# EAGLE board Placa_sensores_brd (EAGLE 9.7.0)
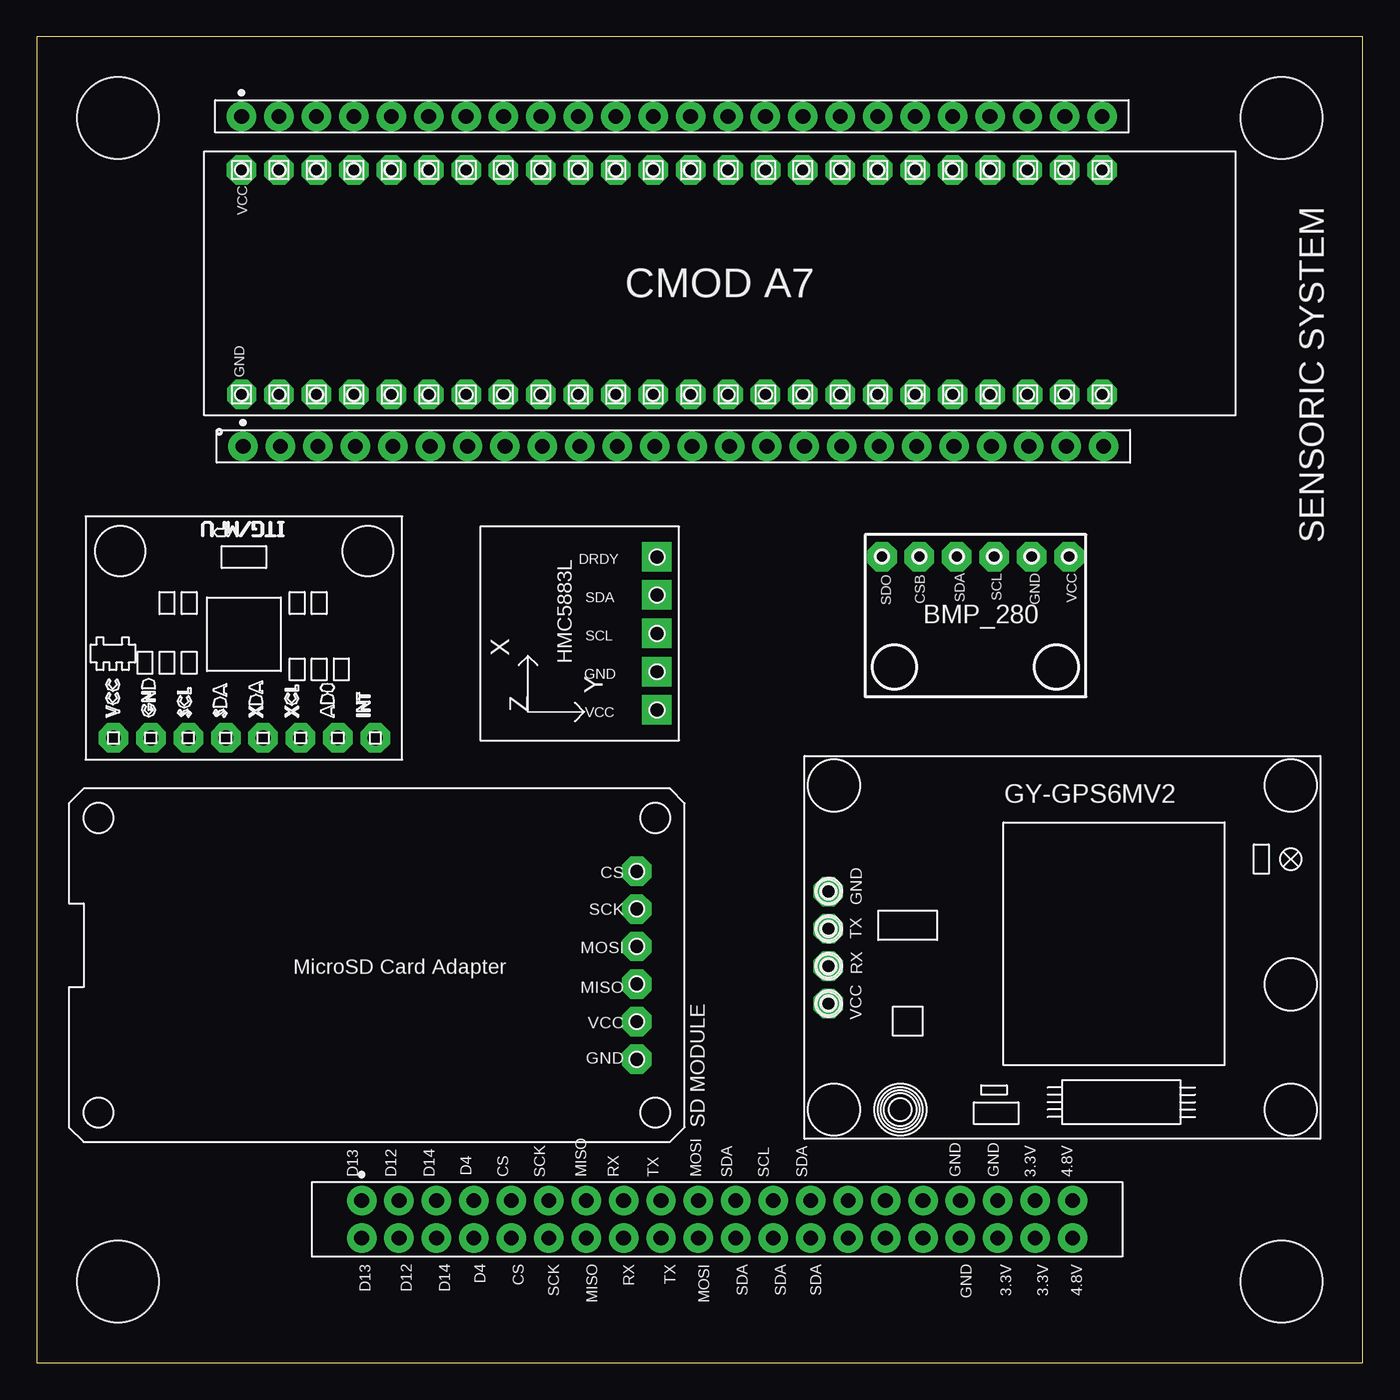
[diagram p0: board, top side]
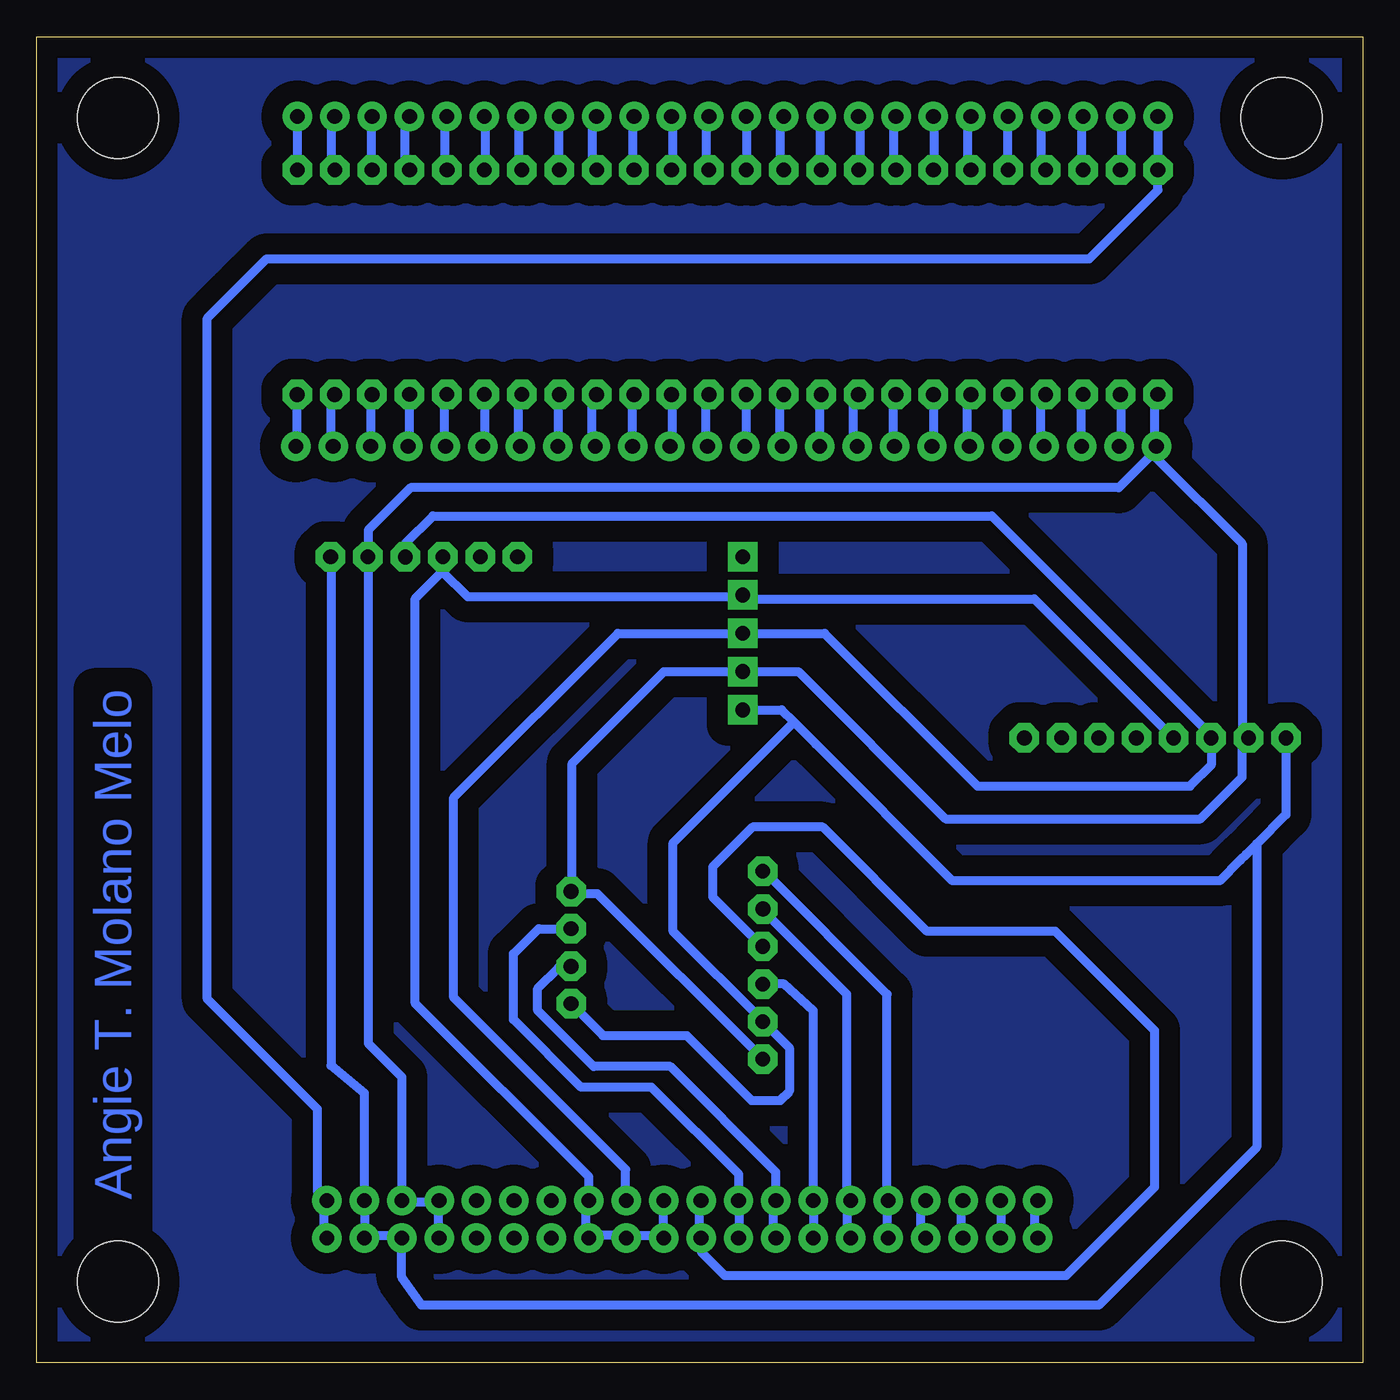
[diagram p1: board, bottom side, seen from below]

Size 90 x 90 mm. Coordinates in mm from the lower left corner, seen from the top.
Outline: 0,90 0,0 90,0 90,90 0,90
Copper layers (1*16): Top 0.035mm / dielectric 1.53mm / Bottom 0.035mm
Design rules "LCFI Uniandes DRC (Eagle-Fusion360 11-2022) *": minimum track width 10mil, minimum drill 0.6mm, track to track 0.3mm, track to pad 0.3mm, pad to pad 0.5mm, via to via 0.3mm, smd to smd 0.2mm, copper to edge 0.5mm, drill to drill 0.5mm, minimum pad ring 0.5mm, minimum via ring 0.3mm, stop-mask expansion 0.05mm, vias tented up to drill 0mil, thermal gap 0.3mm
Holes 5.5 mm at 5.5,84.5 84.5,84.5 5.5,5.5 84.5,5.5

## Footprints (pad centres in the part's own frame; a part is rotated, then mirrored left to right if it is on the bottom)
CMOD-A7 = drill 1 pad 1.8 octagon: 1 -31.795,-7.295; 2 -29.255,-7.305; 3 -26.724,-7.29; 4 -24.18,-7.302; 5 -21.64,-7.296; 6 -19.099,-7.301; 7 -16.557,-7.301; 8 -14.018,-7.301; 9 -11.479,-7.304; 10 -8.944,-7.301; 11 -6.401,-7.302; 12 -3.861,-7.301; 13 -1.322,-7.301; 14 1.222,-7.301; 15 3.76,-7.301; 16 6.299,-7.301; 17 8.835,-7.3; 18 11.381,-7.299; 19 13.921,-7.298; 20 16.459,-7.299; 21 18.999,-7.298; 22 21.542,-7.304; 23 24.077,-7.301; 24 26.624,-7.301; 25 26.619,7.944; 26 24.076,7.937; 27 21.541,7.947; 28 19.003,7.942; 29 16.457,7.935; 30 13.922,7.935; 31 11.379,7.94; 32 8.838,7.946; 33 6.292,7.937; 34 3.768,7.944; 35 1.221,7.935; 36 -1.318,7.94; 37 -3.862,7.94; 38 -6.405,7.94; 39 -8.94,7.945; 40 -11.481,7.951; 41 -14.025,7.936; 42 -16.554,7.944; 43 -19.099,7.942; 44 -21.641,7.94; 45 -24.177,7.942; 46 -26.718,7.938; 47 -29.257,7.942; 48 -31.801,7.94
GY-521 = drill 1 pad 1.82 octagon: ADO -8.64,11.65; GND 4.06,11.66; INT -11.17,11.66; SCL 1.51,11.66; SDA -1.03,11.66; VCC 6.6,11.66; XCL -6.1,11.66; XDA -3.56,11.66
GY-271 = drill 1 square: DRDY 5.11,-5.745; GND -2.69,-5.745; SCL -0.09,-5.745; SDA 2.51,-5.745; VCC -5.29,-5.745
GY-BMP280-FOOTPRINT = drill 1 pad 1.83 octagon: CSB -4.1,-3.8; GND -4.1,3.82; SCK -4.09,1.29; SDI -4.11,-1.26; SDO -4.11,-6.33; VCC -4.1,6.36
GPS-NEO-6M = drill 1 pad 1.778 octagon: P$1 -3.81,14.61; P$2 -1.28,14.61; P$3 1.27,14.61; P$4 3.8,14.61
PINHEADER = drill 1 pad 1.676: 1 0,0; 2 2.54,0; 3 5.08,0; 4 7.62,0; 5 10.16,0; 6 12.7,0; 7 15.24,0; 8 17.78,0; 9 20.32,0; 10 22.86,0; 11 25.4,0; 12 27.94,0; 13 30.48,0; 14 33.02,0; 15 35.56,0; 16 38.1,0; 17 40.64,0; 18 43.18,0; 19 45.72,0; 20 48.26,0; 21 48.26,-2.54; 22 45.72,-2.54; 23 43.18,-2.54; 24 40.64,-2.54; 25 38.1,-2.54; 26 35.56,-2.54; 27 33.02,-2.54; 28 30.48,-2.54; 29 27.94,-2.54; 30 25.4,-2.54; 31 22.86,-2.54; 32 20.32,-2.54; 33 17.78,-2.54; 34 15.24,-2.54; 35 12.7,-2.54; 36 10.16,-2.54; 37 7.62,-2.54; 38 5.08,-2.54; 39 2.54,-2.54; 40 0,-2.54
SD_MODULE = drill 1 pad 1.8 octagon: CS 6.38,-16.96; GND -6.37,-16.96; MISO -1.28,-16.96; MOSI 1.28,-16.96; SCK 3.82,-16.95; VCC -3.82,-16.96
PIN_1X24 = drill 1 pad 1.676: 1 0,0; 2 2.54,0; 3 5.08,0; 4 7.62,0; 5 10.16,0; 6 12.7,0; 7 15.24,0; 8 17.78,0; 9 20.32,0; 10 22.86,0; 11 25.4,0; 12 27.94,0; 13 30.48,0; 14 33.02,0; 15 35.56,0; 16 38.1,0; 17 40.64,0; 18 43.18,0; 19 45.72,0; 20 48.26,0; 21 50.8,0; 22 53.34,0; 23 55.88,0; 24 58.42,0

## Placement (x,y rotation side)
CMOD  CMOD-A7  [CMOD-A7]  45.7,73.02 0 top
U1  GY-521  [GY-521]  11.8,54.07 180 top
U2  HMC5883L  [GY-271]  36.34,49.6 90 top
U$1  GY-BPM280  [GY-BMP280-FOOTPRINT]  63.7,50.6 270 top
U$2  GPS-NEO-6M  [GPS-NEO-6M]  68.35,28.18 90 top
U$3  PINHEADER  [PINHEADER]  22.05,11 0 top
U$4  SD_MODULE  [SD_MODULE]  23.77,26.98 90 top
U$5  PIN1X24  [PIN_1X24]  13.9,84.6 0 top
U$6  PIN1X24  [PIN_1X24]  14,62.2 0 top

## Library data of the parts
CMOD = CMOD-A7
U1 = MPU6050
U2 = HMC5883L
U$1 = BMP_280
U$2 = GPS-NEO-6M
U$3 = PINHEADER-40
U$4 = SD_MODULE
U$5 U$6 = PIN_1X24

## Nets
3.3V: U1.VCC U2.VCC U$1.VCC U$2.P$1 U$3.19 U$3.22 U$3.23 U$4.VCC
4.8V: CMOD.48 U$3.20 U$3.21 U$5.1
CS: U$3.5 U$3.36 U$4.CS
D4: U$3.4 U$3.37
D12: U$3.2 U$3.39
D13: U$3.1 U$3.40
D14: U$3.3 U$3.38
GND: CMOD.1 U1.GND U2.GND U$1.GND U$2.P$4 U$3.17 U$3.18 U$3.24 U$4.GND U$6.1
MISO: U$3.7 U$3.34 U$4.MISO
MOSI: U$3.10 U$3.31 U$4.MOSI
N$3: CMOD.47 U$5.2
N$4: CMOD.46 U$5.3
N$5: CMOD.45 U$5.4
N$6: CMOD.44 U$5.5
N$7: CMOD.43 U$5.6
N$8: CMOD.42 U$5.7
N$9: CMOD.41 U$5.8
N$10: CMOD.27 U$5.22
N$11: CMOD.40 U$5.9
N$12: CMOD.39 U$5.10
N$13: CMOD.26 U$5.23
N$14: CMOD.38 U$5.11
N$15: CMOD.37 U$5.12
N$16: CMOD.36 U$5.13
N$17: CMOD.35 U$5.14
N$18: CMOD.34 U$5.15
N$19: CMOD.33 U$5.16
N$20: CMOD.32 U$5.17
N$21: CMOD.31 U$5.18
N$22: CMOD.30 U$5.19
N$23: CMOD.29 U$5.20
N$24: CMOD.28 U$5.21
N$25: CMOD.25 U$5.24
N$27: CMOD.2 U$6.2
N$28: CMOD.3 U$6.3
N$29: CMOD.4 U$6.4
N$30: CMOD.5 U$6.5
N$31: CMOD.6 U$6.6
N$32: CMOD.7 U$6.7
N$33: CMOD.24 U$6.24
N$34: CMOD.23 U$6.23
N$35: CMOD.22 U$6.22
N$36: CMOD.21 U$6.21
N$37: CMOD.20 U$6.20
N$38: CMOD.19 U$6.19
N$39: CMOD.18 U$6.18
N$40: CMOD.17 U$6.17
N$41: CMOD.16 U$6.16
N$42: CMOD.15 U$6.15
N$43: CMOD.14 U$6.14
N$44: CMOD.13 U$6.13
N$45: CMOD.12 U$6.12
N$46: CMOD.11 U$6.11
N$47: CMOD.10 U$6.10
N$48: CMOD.9 U$6.9
N$49: CMOD.8 U$6.8
RX: U$2.P$2 U$3.8 U$3.33
SCK: U$3.6 U$3.35 U$4.SCK
SCL: U1.SCL U2.SCL U$1.SCK U$3.12
SDA: U1.SDA U2.SDA U$1.SDI U$3.11 U$3.13 U$3.28 U$3.29 U$3.30
TX: U$2.P$3 U$3.9 U$3.32

## Tracks (layer width: path | path; a pad name or v marks a point on that pad's centre or on a via)
3.3V
  Bottom 0.61: 67.77,8.64 65.49,8.64 U$3.23 65.23,5.8 63.9,3.91 17.92,3.91 7.2,14.63 7.2,35.21 | 67.77,8.64 U$3.22 67.77,8.64 | U$1.VCC 70.04,54.45 70.04,20.17 67.77,18.3 U$3.19 67.77,10.91 67.77,8.64 | U$2.P$1 51.57,22.2 45.89,22.2 41.49,17.8 39.54,17.8 38.91,18.43 38.91,21.38 40.69,23.16 U$4.VCC 40.73,23.19 46.81,29.27 46.81,35.29 38.61,43.49 | 7.2,35.21 5.2,37.21 U1.VCC | 7.2,35.21 7.9,34.51 8.3,34.11 9.7,32.71 27.84,32.71 37.11,41.99 38.61,43.49 | U2.VCC 39.44,44.31 38.61,43.49
4.8V
  Bottom 0.61: U$3.21 70.49,8.64 70.49,10.91 U$3.20 70.95,11.64 70.95,17.21 78.43,24.69 78.43,70.9 74.4,74.94 18.56,74.94 13.9,79.6 CMOD.48 | U$5.1 CMOD.48 | CMOD.48
CS
  Bottom 0.61: U$4.CS 40.48,33.2 32.29,25.01 32.29,11.37 U$3.5 32.29,10.91 32.29,8.64 U$3.36
D4
  Bottom 0.61: U$3.37 30.02,8.64 30.02,10.91 U$3.4
D12
  Bottom 0.61: U$3.39 24.56,8.64 24.56,10.91 U$3.2
D13
  Bottom 0.61: U$3.40 22.29,8.64 22.29,10.91 U$3.1
D14
  Bottom 0.61: U$3.38 27.29,8.64 27.29,10.91 U$3.3
GND
  Bottom 0.61: 62.76,10.91 62.76,8.64 U$3.24 | 62.76,10.91 U$3.17 62.76,10.91 | 62.76,10.91 65.04,10.91 U$3.18 65.23,19.4 67.51,21.68 U$1.GND 67.51,56.51 64.63,59.39 16.56,59.39 14.1,61.85 U$6.1 | U$6.1 14,61.39 8.19,55.6 8.19,42.75 U1.GND 8.19,42.3 8.19,39.74 11.01,36.92 28.32,36.92 38.31,46.91 U2.GND 47.43,46.91 53.67,40.67 53.67,32.29 U$2.P$4 53.67,31.84 51.95,31.84 U$4.GND | CMOD.1 14.1,65.49 14.1,62.31 U$6.1
MISO
  Bottom 0.61: U$4.MISO 39.27,25.7 37.29,23.89 37.29,11.37 U$3.7 37.29,10.91 37.29,8.64 U$3.34
MOSI
  Bottom 0.61: U$3.10 45.02,10.91 45.02,8.64 U$3.31 44.91,7.53 43.31,5.92 20.12,5.92 14.11,11.93 14.11,22.53 20.87,29.29 29.57,29.29 36.64,36.36 41.41,36.36 44.13,33.64 44.13,31.62 40.76,28.26 U$4.MOSI
N$1
  pour Bottom (isolate 1.422): 0.2,0.2 89.8,0.2 89.8,89.8 0.2,89.8
N$3
  Bottom 0.61: CMOD.47 16.37,81.41 16.37,84.59 U$5.2
N$4
  Bottom 0.61: CMOD.46 19.1,81.41 19.1,84.59 U$5.3
N$5
  Bottom 0.61: CMOD.45 21.83,81.41 21.83,84.59 U$5.4
N$6
  Bottom 0.61: CMOD.44 24.1,81.41 24.1,84.59 U$5.5
N$7
  Bottom 0.61: CMOD.43 26.83,81.41 26.83,84.59 U$5.6
N$8
  Bottom 0.61: CMOD.42 29.11,81.41 29.11,84.59 U$5.7
N$9
  Bottom 0.61: CMOD.41 31.84,81.41 31.84,84.59 U$5.8
N$10
  Bottom 0.61: CMOD.27 67.31,81.41 67.31,84.59 U$5.22
N$11
  Bottom 0.61: CMOD.40 34.11,81.41 34.11,84.59 U$5.9
N$12
  Bottom 0.61: CMOD.39 36.84,81.41 36.84,84.59 U$5.10
N$13
  Bottom 0.61: CMOD.26 70.04,81.41 70.04,84.59 U$5.23
N$14
  Bottom 0.61: CMOD.38 39.57,81.41 39.57,84.59 U$5.11
N$15
  Bottom 0.61: CMOD.37 41.84,81.41 U$5.12
N$16
  Bottom 0.61: CMOD.36 44.57,81.41 44.57,84.59 U$5.13
N$17
  Bottom 0.61: CMOD.35 46.84,81.41 46.84,84.59 U$5.14
N$18
  Bottom 0.61: CMOD.34 49.57,81.41 49.57,84.59 U$5.15
N$19
  Bottom 0.61: CMOD.33 52.3,81.41 52.3,84.59 U$5.16
N$20
  Bottom 0.61: CMOD.32 54.58,81.41 54.58,84.59 U$5.17
N$21
  Bottom 0.61: CMOD.31 57.3,81.41 57.3,84.59 U$5.18
N$22
  Bottom 0.61: CMOD.30 59.58,81.41 59.58,84.59 U$5.19
N$23
  Bottom 0.61: CMOD.29 62.31,81.41 62.31,84.59 U$5.20
N$24
  Bottom 0.61: CMOD.28 65.04,81.41 65.04,84.59 U$5.21
N$25
  Bottom 0.61: CMOD.25 72.31,81.41 U$5.24
N$27
  Bottom 0.61: CMOD.2 16.37,65.49 16.37,62.31 U$6.2
N$28
  Bottom 0.61: CMOD.3 19.1,65.49 19.1,62.31 U$6.3
N$29
  Bottom 0.61: CMOD.4 21.83,65.49 21.83,62.31 U$6.4
N$30
  Bottom 0.61: CMOD.5 24.1,65.49 24.1,62.31 U$6.5
N$31
  Bottom 0.61: CMOD.6 26.83,65.49 26.83,62.31 U$6.6
N$32
  Bottom 0.61: CMOD.7 29.11,65.49 29.11,62.31 U$6.7
N$33
  Bottom 0.61: CMOD.24 72.31,65.49 72.31,62.31 U$6.24
N$34
  Bottom 0.61: CMOD.23 70.04,65.49 70.04,62.31 U$6.23
N$35
  Bottom 0.61: CMOD.22 67.31,65.49 67.31,62.31 U$6.22
N$36
  Bottom 0.61: CMOD.21 64.74,65.69 64.74,62.26 U$6.21
N$37
  Bottom 0.61: CMOD.20 62.31,65.49 62.31,62.31 U$6.20
N$38
  Bottom 0.61: CMOD.19 59.58,65.49 59.58,62.31 U$6.19
N$39
  Bottom 0.61: CMOD.18 57.3,65.49 57.3,62.31 U$6.18
N$40
  Bottom 0.61: CMOD.17 54.58,65.49 54.58,62.31 U$6.17
N$41
  Bottom 0.61: CMOD.16 52.3,65.49 52.3,62.31 U$6.16
N$42
  Bottom 0.61: CMOD.15 49.57,65.49 49.57,62.31 U$6.15
N$43
  Bottom 0.61: CMOD.14 46.84,65.49 46.84,62.31 U$6.14
N$44
  Bottom 0.61: CMOD.13 44.57,65.49 44.57,62.31 U$6.13
N$45
  Bottom 0.61: CMOD.12 41.84,65.49 41.84,62.31 U$6.12
N$46
  Bottom 0.61: CMOD.11 39.57,65.49 39.57,62.31 U$6.11
N$47
  Bottom 0.61: CMOD.10 36.84,65.49 36.84,62.31 U$6.10
N$48
  Bottom 0.61: CMOD.9 34.56,65.49 34.56,62.31 U$6.9
N$49
  Bottom 0.61: CMOD.8 31.84,65.49 31.84,62.31 U$6.8
RX
  Bottom 0.61: U$3.33 40.02,8.64 40.02,10.91 U$3.8 39.83,12.93 47,20.1 52.2,20.1 56,23.9 56,25.4 54.6,26.8 53.84,26.8 U$2.P$2
SCK
  Bottom 0.61: U$4.SCK 40.48,30.47 35.02,25.01 35.02,11.37 U$3.6 35.02,10.91 35.02,8.64 U$3.35
SCL
  Bottom 0.61: U$1.SCK 64.99,55.6 63.12,57.47 25.18,57.47 10.46,42.75 U1.SCL 10.29,40.57 11.72,39.13 26.15,39.13 36.52,49.51 U2.SCL 50.56,49.51 61.7,38.37 61.7,24.8 50.03,13.12 50.03,11.37 U$3.12
SDA
  Bottom 0.61: U$3.30 47.75,8.64 49.57,8.64 U$3.29 50.03,8.64 52.3,8.64 U$3.28 52.76,8.64 52.76,10.91 U$3.13 52.53,12.6 64.31,24.38 64.31,51.86 62.44,53.73 U$1.SDI 62.44,53.68 60.76,52 42.2,52 U2.SDA 41.84,51.85 22.29,51.85 13.19,42.75 U1.SDA | U$3.30 | U$3.30 U$3.11
TX
  Bottom 0.61: U$3.32 42.3,8.64 42.3,10.91 U$3.9 42.35,11.02 42.35,12.77 48.28,18.7 53.05,18.7 57.64,23.29 57.64,27.75 55.94,29.45 U$2.P$3

## Text on the board
Bottom: Angie T. Molano Melo
tPlace: VCC | SENSORIC SYSTEM | GND | DRDY | SDO | CSB | SDA | SCL | GND | VCC | SDA | SCL | GND | VCC | D13 | D12 | D14 | D4 | CS | SCK | MISO | RX | TX | MOSI | SDA | SCL | SDA | GND | GND | 3.3V | 4.8V | D13 | D12 | D14 | D4 | CS | SCK | MISO | RX | TX | MOSI | SDA | SDA | SDA | GND | 3.3V | 3.3V | 4.8V